# Altium PCB PS004.PcbDoc
Units mm, origin at the board's own origin, x right, y up, seen from the top; angles counter-clockwise.
Board outline 41 x 36.3 mm, 2 copper layers (Top Layer, Bottom Layer); 124 components, 75 nets, 275 pads, 82 vias.
Unrouted connection lines stored in the file: 1.
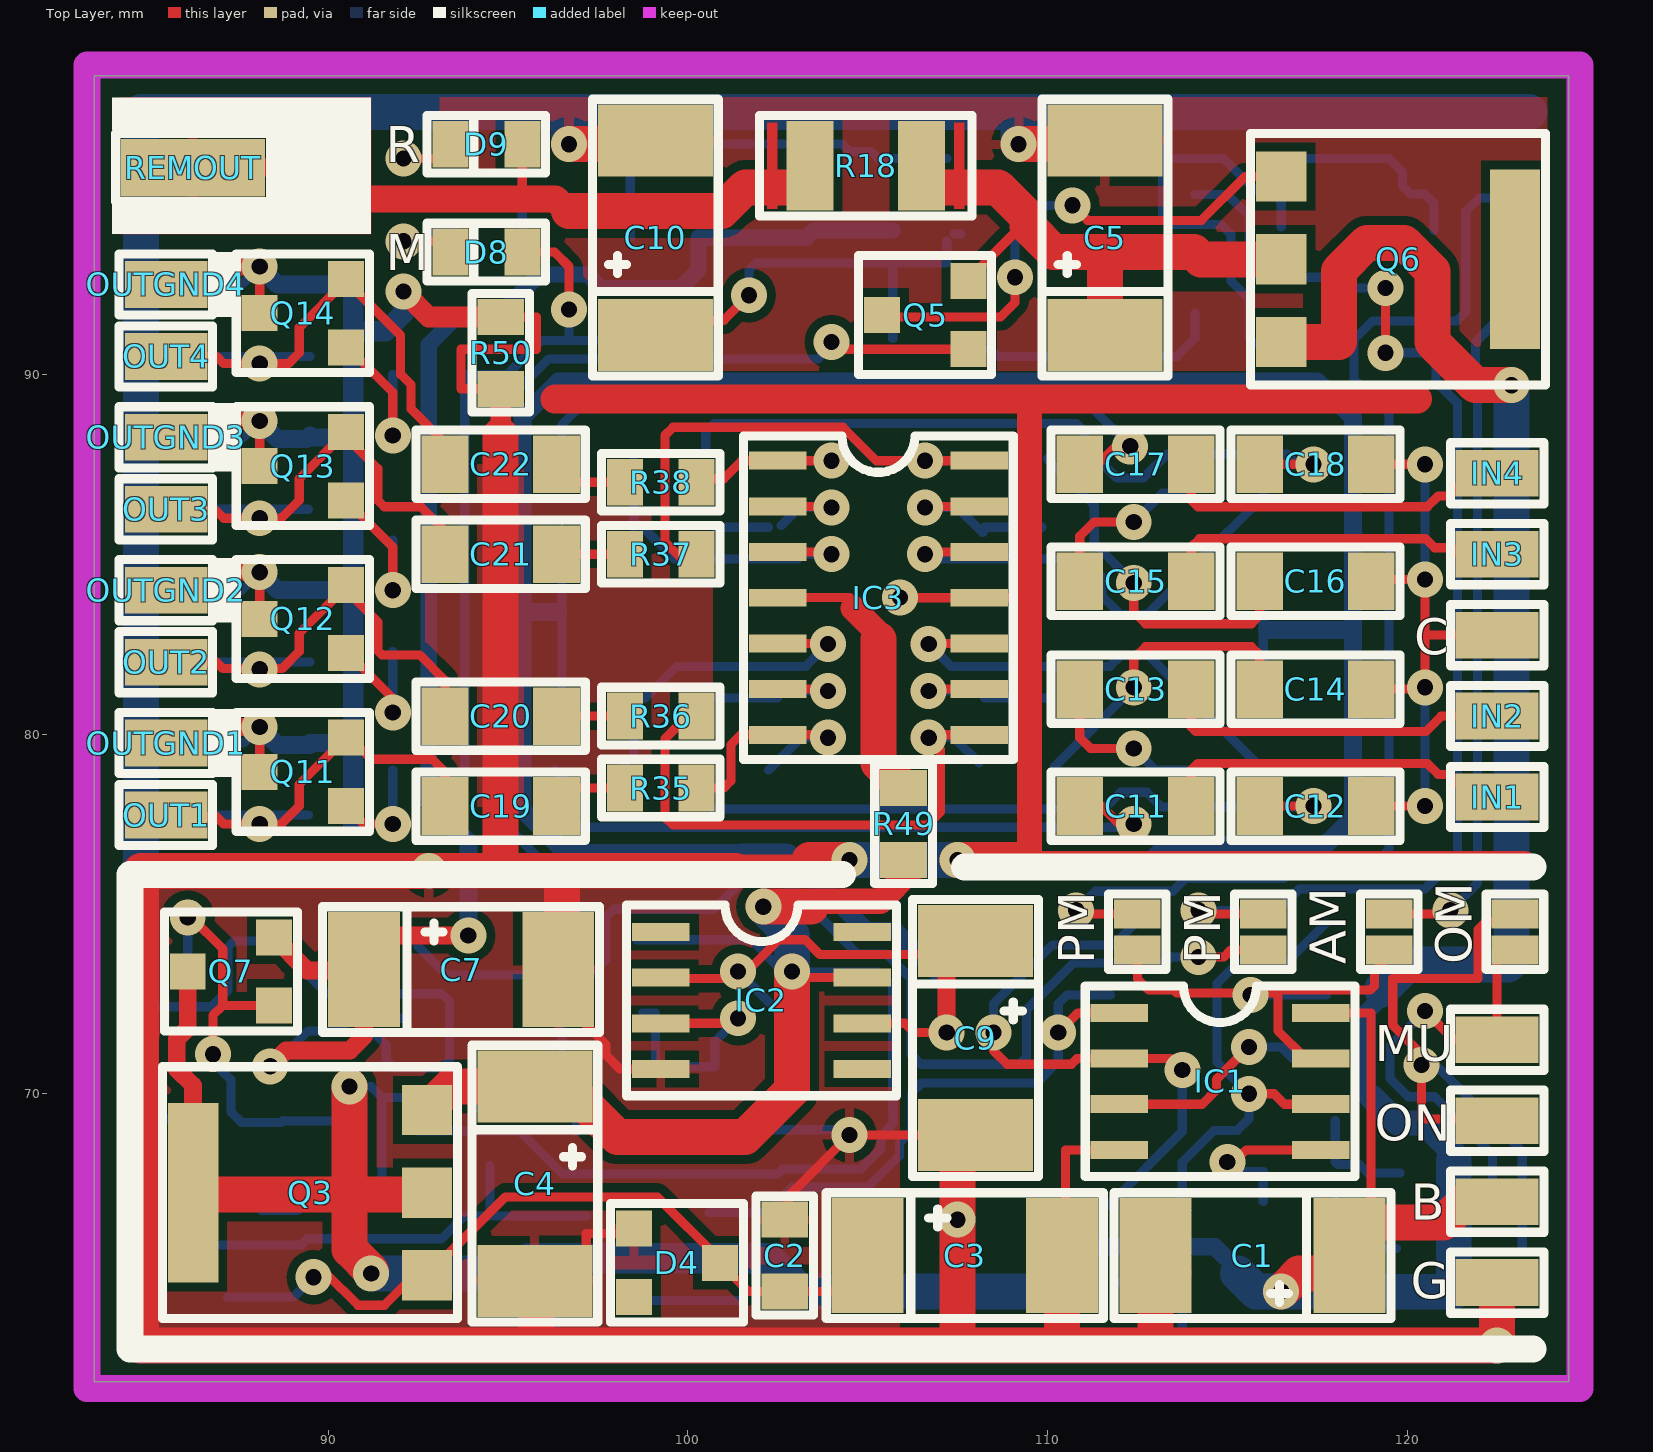
[diagram p0: Top Layer view]
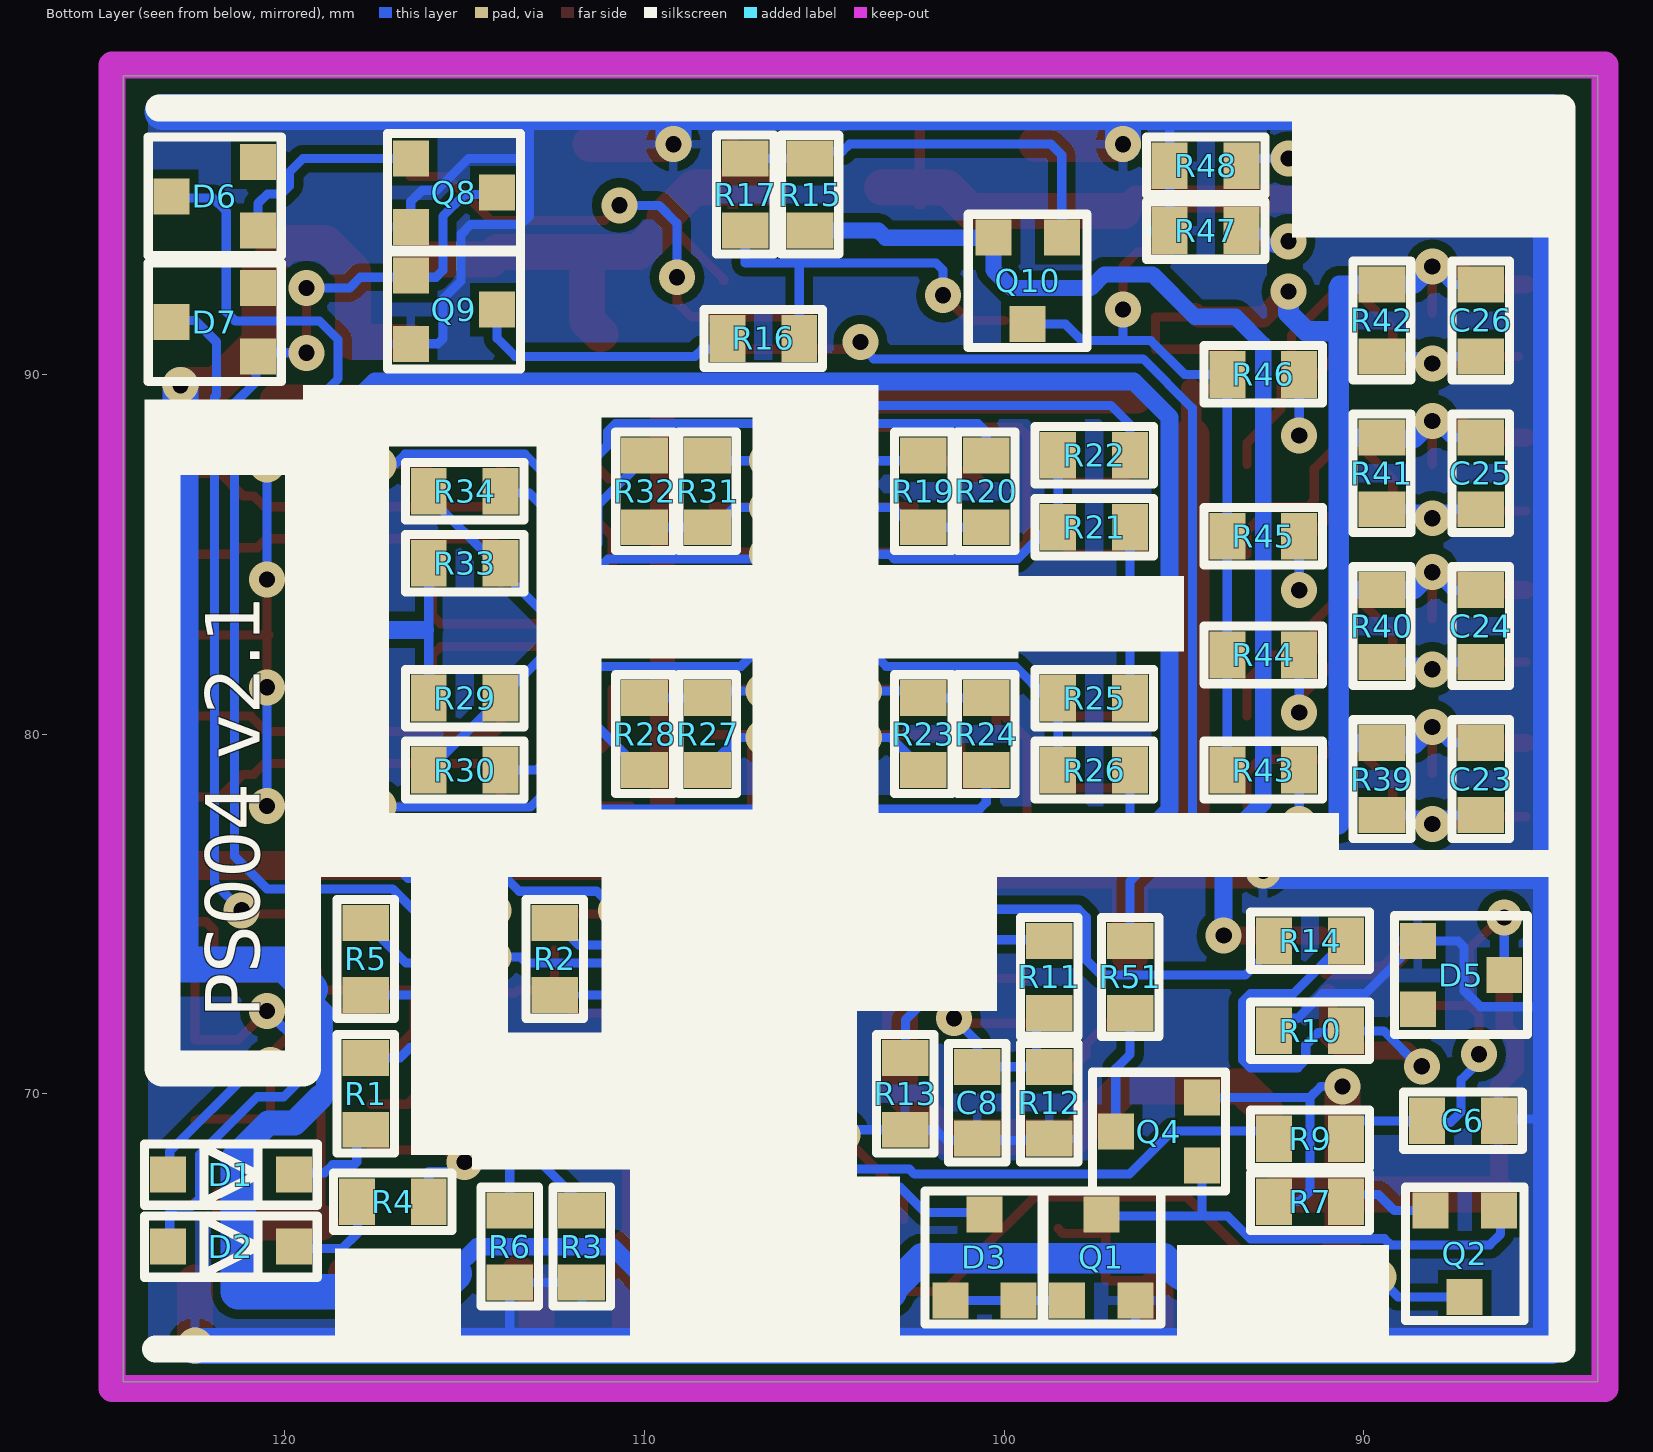
[diagram p1: Bottom Layer view, seen from below]

## Layer stack, top to bottom
Top Layer: signal copper 0.0356
Dielectric: dielectric 0.32, FR-4, Dk 4.8
Bottom Layer: signal copper 0.0356

## Board outline
83.5,98.3 83.5,62 124.5,62 124.5,98.3

## Design rules (kind name [scope] priority, off if disabled: settings)
Clearance [All] p1: gap=0.254
ComponentClearance [All] p1 off: gap=0.254 collisioncheckmode=3 verticalgap=0.254 showdistances=FALSE
PolygonConnect [All] p1: connectstyle=Relief reliefconductorwidth=0.254 reliefentries=4 polygonreliefangle="90 Angle"
RoutingCorners [All] p1: cornerstyle=Round minsetback=2.54 maxsetback=2.54
RoutingVias [All] p1: holewidth=0.45 width=1 viastyle="Through Hole" minholewidth=0.25 minwidth=0.45 maxholewidth=0.411 maxwidth=1.27
SilkToSilkClearance [All] p1 off: silktosilkclearance=0.254
SilkscreenOverComponentPads [All] p1 off: minsilkscreentomaskgap=0.254
SolderMaskExpansion [All] p1: expansion=0.102
Width [All] p1: maxlimit=1.5 minlimit=0.254 preferedwidth=0.254 minimp=50.000000 maximp=50.000000 favimp=50.000000
24 further rules are at their usual default settings.

## Components (designator, comment, footprint, x,y, rotation, side; value= is the part's Value field where it differs from the comment)
AM "SC plan" SC 119.5,74 r90 top
B "IN plan" IO 122.5,67 r0 top (schematic designator BU)
C "IN plan" IO 122.5,82.75 r0 top (schematic designator "IN COM")
C1 "C plan pol" C 118.4,65.5 r180 top
C2 "C plan cer" 0805 102.7,66.5 r270 top
C3 "C plan pol" C 105,65.5 r0 top
C4 "C plan pol" C 95.75,70.2 r270 top
C5 "C plan pol" C 111.6,91.1 r90 top
C6 "C plan cer" 0805 86.25,69.25 r0 bottom
C7 "C plan pol" C 91,73.45 r0 top
C8 "C plan cer" 0805 100.75,68.75 r90 bottom
C9 "C plan pol" C 108,74.25 r270 top
C10 "C plan pol" C 99.1,91.1 r90 top
C11 "C plan cer" 1206 114,78 r180 top
C12 "C plan cer" 1206 119,78 r180 top
C13 "C plan cer" 1206 114,81.25 r180 top
C14 "C plan cer" 1206 119,81.25 r180 top
C15 "C plan cer" 1206 114,84.25 r180 top
C16 "C plan cer" 1206 119,84.25 r180 top
C17 "C plan cer" 1206 114,87.5 r180 top
C18 "C plan cer" 1206 119,87.5 r180 top
C19 "C plan cer" 1206 93.25,78 r0 top
C20 "C plan cer" 1206 93.25,80.5 r0 top
C21 "C plan cer" 1206 93.25,85 r0 top
C22 "C plan cer" 1206 93.25,87.5 r0 top
C23 "C plan cer" 0805 86.75,79.75 r270 bottom
C24 "C plan cer" 0805 86.75,84 r270 bottom
C25 "C plan cer" 0805 86.75,88.25 r270 bottom
C26 "C plan cer" 0805 86.75,92.5 r270 bottom
D1 "D plan" SOD-123 119.75,67.75 r0 bottom
D2 "D plan" SOD-123 119.75,65.75 r0 bottom
D3 "DZ plan" SOT-23 101.5,64.25 r90 bottom
D4 "DZ plan" SOT-23 98.5,66.25 r0 top
D5 "DZ plan" SOT-23 88.5,74.25 r180 bottom
D6 "DZ plan" SOT-23 120.75,94 r0 bottom
D7 "DZ plan" SOT-23 120.75,90.5 r0 bottom
D8 "M" "0805 DI" 93.4,93.4 r0 top
D9 "R" "0805 DI" 93.4,96.4 r0 top
G "IN plan" IO 122.5,64.75 r0 top (schematic designator GND)
IC1 "IC 8 plan" SO-8 112,72.25 r0 top
IC2 "IC 8 plan" SO-8 99.25,74.5 r0 top
IC3 "IC 14 plan" SO-14 102.5,87.6 r0 top
IN1 "IN plan" IO 122.5,78.25 r0 top
IN2 "IN plan" IO 122.5,80.5 r0 top
IN3 "IN plan" IO 122.5,85 r0 top
IN4 "IN plan" IO 122.5,87.25 r0 top
MU "IN plan" IO 122.5,71.5 r0 top (schematic designator MUTE)
OM "SC plan" SC 123,74 r90 top
ON "IN plan" IO 122.5,69.25 r0 top
OUT1 "OUT plan" IO 85.5,77.75 r180 top
OUT2 "OUT plan" IO 85.5,82 r180 top
OUT3 "OUT plan" IO 85.5,86.25 r180 top
OUT4 "OUT plan" IO 85.5,90.5 r180 top
OUTGND1 "OUT plan" IO 85.5,79.75 r180 top
OUTGND2 "OUT plan" IO 85.5,84 r180 top
OUTGND3 "OUT plan" IO 85.5,88.25 r180 top
OUTGND4 "OUT plan" IO 85.5,92.5 r180 top
PM "SC plan" SC 116,75 r270 top (schematic designator PM1)
PM "SC plan" SC 112.5,74 r90 top (schematic designator PM0)
Q1 "QD npn plan" SOT-23 98.25,64.25 r90 bottom
Q2 "QD pnp plan" SOT-23 86.25,66.75 r270 bottom
Q3 "Q npn plan" SOT-223 92.75,64.95 r180 top
Q4 "QD pnp plan" SOT-23 94.5,68 r0 bottom
Q5 "Q npn plan" SOT-23 107.8,90.7 r180 top
Q6 "Q pnp plan" SOT-223 116.5,95.5 r0 top
Q7 "Q npn plan" SOT-23 88.5,72.45 r180 top
Q8 "QD npn plan" SOT-23 116.5,96 r180 bottom
Q9 "QD npn plan" SOT-23 116.5,92.75 r180 bottom
Q10 "Q pnp plan" SOT-23 98.4,93.8 r270 bottom
Q11 "Q npn plan" SOT-23 90.5,78 r180 top
Q12 "Q npn plan" SOT-23 90.5,82.25 r180 top
Q13 "Q npn plan" SOT-23 90.5,86.5 r180 top
Q14 "Q npn plan" SOT-23 90.5,90.75 r180 top
R1 "R plan" 0805 117.75,69 r90 bottom
R2 "R plan" 0805 112.5,74.75 r270 bottom
R3 "R plan" 0805 111.75,64.75 r90 bottom
R4 "R plan" 0805 118,67 r180 bottom
R5 "R plan" 0805 117.75,72.75 r90 bottom
R6 "R plan" 0805 113.75,64.75 r90 bottom
R7 "R plan" 0805 92.5,67 r180 bottom
R9 "R plan" 0805 92.5,68.75 r180 bottom
R10 "R plan" 0805 92.5,71.75 r180 bottom
R11 "R plan" 0805 98.75,72.25 r90 bottom
R12 "R plan" 0805 98.75,68.75 r90 bottom
R13 "R plan" 0805 102.75,69 r90 bottom
R14 "R plan" 0805 92.5,74.25 r180 bottom
R15 "R plan" 0805 105.4,96 r270 bottom
R16 "R plan" 0805 105.7,91 r0 bottom
R17 "R plan" 0805 107.2,94 r90 bottom
R18 "R plan" 1210 106.5,95.8 r180 top
R19 "R plan" 0805 102.25,85.75 r90 bottom
R20 "R plan" 0805 100.5,85.75 r90 bottom
R21 "R plan" 0805 98.5,85.75 r180 bottom
R22 "R plan" 0805 98.5,87.75 r180 bottom
R23 "R plan" 0805 102.25,79 r90 bottom
R24 "R plan" 0805 100.5,81 r270 bottom
R25 "R plan" 0805 98.5,81 r180 bottom
R26 "R plan" 0805 98.5,79 r180 bottom
R27 "R plan" 0805 108.25,79 r90 bottom
R28 "R plan" 0805 110,79 r90 bottom
R29 "R plan" 0805 116,81 r180 bottom
R30 "R plan" 0805 114,79 r0 bottom
R31 "R plan" 0805 108.25,85.75 r90 bottom
R32 "R plan" 0805 110,87.75 r270 bottom
R33 "R plan" 0805 116,84.75 r180 bottom
R34 "R plan" 0805 114,86.75 r0 bottom
R35 "R plan" 0805 98.25,78.5 r0 top
R36 "R plan" 0805 98.25,80.5 r0 top
R37 "R plan" 0805 98.25,85 r0 top
R38 "R plan" 0805 98.25,87 r0 top
R39 "R plan" 0805 89.5,79.75 r270 bottom
R40 "R plan" 0805 89.5,84 r270 bottom
R41 "R plan" 0805 89.5,88.25 r270 bottom
R42 "R plan" 0805 89.5,92.5 r270 bottom
R43 "R plan" 0805 91.8,79 r0 bottom
R44 "R plan" 0805 91.8,82.2 r0 bottom
R45 "R plan" 0805 91.8,85.5 r0 bottom
R46 "R plan" 0805 91.8,90 r0 bottom
R47 "R plan" 0805 95.4,94 r180 bottom
R48 "R plan" 0805 95.4,95.8 r180 bottom
R49 "R plan" 0805 106,76.5 r90 top
R50 "R plan" 0805 94.8,91.6 r270 top
R51 "R plan" 0805 96.5,72.25 r90 bottom
REMOUT "OUT plan" IOEX 86.25,95.75 r180 top

## Footprints (in the part's own frame and the unit in brackets; to place one, negate y for a bottom-side part, rotate by r counter-clockwise, add the part's x,y. Pads: shape width x height; smd on the part's side, far side on the other; paste and mask are expansions set on the pad)
0805 [mm]
  rect 1x1.3 smd: 1(0,0) 2(2,0)
  silkscreen extent -0.65,-0.8 2.65,0.8
"0805 DI" [mm]
  rect 1x1.3 smd: 1(0,0) 2(2,0)
  silkscreen extent -0.65,-0.8 2.65,0.8
1206 [mm]
  rect 1.3x1.6 smd: 1(0,0) 2(3.1,0)
  silkscreen extent -0.8,-0.95 3.9,0.95
1210 [mm]
  rect 1.3x2.5 smd: 1(0,0) 2(3.1,0)
C [mm]
  rect 2x3.2 smd: 1(0,0) 2(5.4,0)
  silkscreen extent -1.15,-1.75 6.55,1.75
IO [mm]
  rect 2.3x1.3 smd: 1(0,0)
  silkscreen extent -1.29,-0.85 1.31,0.85
IOEX [mm]
  rect 4x1.6 smd: 1(0,0)
  silkscreen extent -2.15,-0.95 2.15,0.95
SC [mm]
  rect 0.8x1.3 smd: 1(0,0) 2(1,0)
  silkscreen extent -0.55,-0.8 1.55,0.8
SO-8 [mm]
  rect 1.6x0.5 smd: 1(0,0) 2(0,-1.27) 3(0,-2.54) 4(0,-3.81) 5(5.6,-3.81) 6(5.6,-2.54) 7(5.6,-1.27) 8(5.6,0)
  silkscreen extent -0.95,-4.55 6.55,0.74
SO-14 [mm]
  rect 1.6x0.5 smd: 1(0,0) 2(0,-1.27) 3(0,-2.54) 4(0,-3.81) 5(0,-5.08) 6(0,-6.35) 7(0,-7.62) 8(5.6,-7.62) 9(5.6,-6.35) 10(5.6,-5.08) 11(5.6,-3.81) 12(5.6,-2.54) 13(5.6,-1.27) 14(5.6,0)
  silkscreen extent -0.95,-8.31 6.55,0.69
SOD-123 [mm]
  rect 1x1 smd: 1(0,0) 2(3.5,0)
  silkscreen extent -0.65,-0.85 4.15,0.85
SOT-23 [mm]
  rect 1x1 smd: 1(0,0) 2(2.4,-0.95) 3(0,-1.9)
  silkscreen extent -0.65,-2.6 3.05,0.7
SOT-223 [mm]
  rect 1.4x1.4 smd: 1(0,0) 2(0,-2.3) 3(0,-4.6)
  rect 1.4x5 smd: 4(6.5,-2.3)
  silkscreen extent -0.85,-5.8 7.35,1.2

## Part data
D8 D9: library part "DI plan"

## Via types
v1: diameter 1, hole 0.45, Top Layer to Bottom Layer, tented both sides, 82 vias

## Nets (pads, with @x,y where several pads share a name; then routed paths per layer and width w, separated by ;. In a path a pad name is that pad's centre, name@x,y a point inside that pad or via, vN(x,y) a via of type N, cw(c..) or ccw(c..) an arc to the next point about the centre after c; other vN are vias at no path point)
BU: B.1 C1.1 IC1.8 Q3.2 Q3.4 Q4.3 Q6.3 Q7.2 R7.1 | length 112.2
  Top Layer w0.254: Q7.2@85.809,73.109 Q7.2 ; Q3.2@92.6,67.25 Q3.2 ; IC1.8 118.999,72.25 ; C1.1@119,66.421 119,72.249 ; B.1@121.59,67 B.1
  Top Layer w0.48: 85.797,70.683 86.25,70.23 ; 85.797,70.703 85.797,71.517 86.1,71.82
  Top Layer w0.5: 86.1,71.82 Q7.2 ; Q3.4 86.25,70.23
  Top Layer w1: Q3.4@86.25,67.2 90.6,67.2 ; v1(90.6,70.2) 90.6,67.2 ; v1@91.2,65.073 90.6,65.673 90.6,67.2 ; Q3.2@92.5,67.2 90.6,67.2 ; v1(116.5,64.5) 116.9,64.9 ; Q6.3 118.1,90.9 118.1,92.873 118.881,93.654 119.919,93.654 120.7,92.873 120.7,90.9 121.9,89.7 v1(122.9,89.7) ; 117,65 C1.1@118.3,65 ; C1.1@117.9,64.8 C1.1@118.3,64.8 ; C1.1@119,66.421 121.011,66.421 B.1@121.59,67
  Bottom Layer w0.254: v1(90.6,70.2) 91.2,70.2 91.5,69.9 ; R7.1 91.8,67 91.5,67.3 91.5,69.9 ; Q4.3@94.2,69.6 Q4.3 91.5,69.9
  Bottom Layer w0.48: 109.651,64.5 110.895,65.744 114.656,65.744 115.3,65.1 ; 118.898,70.022 118.898,72.298 119.3,72.7
  Bottom Layer w0.7: 119.01,69.91 119.732,69.188 120.462,69.188 121.296,68.354
  Bottom Layer w0.85: 95.14,65 95.569,65.429 102.281,65.429 103.21,64.5
  Bottom Layer w1: v1(91.2,65) 95,65 ; 103.21,64.5 109.651,64.5 ; 115.3,65 115.8,64.5 v1(116.5,64.5) ; v1@116.5,64.496 121.296,64.496 121.296,68.142 ; 119.3,72.9 120,73.6 122.8,73.6 ; 122.9,73.7 v1(122.9,89.7)
GND: C1.2 C2.1 C3.2 C4.2 C5.2 C6.1 C7.2 C8.1 C9.2 C10.2 D4.1 D5.1 G.1 IC1.4 IC2.4 IC3.11 Q1.3 Q8.3 Q9.3 R3.1 R6.1 R10.1 R12.1 R13.1 R47.1 R48.1 R50.2 | length 344.4
  Top Layer w0.254: R50.2 93.7,89.6 93.7,90.7 95.8,90.7 ; C4.2 97.18,64.8 97.18,66.116 98.366,66.116 D4.1 ; C7.2@96.6,72.489 97.731,71.358 97.731,71.069 98.11,70.69 IC2.4 ; C7.2@96.89,72.5 C7.2@96.949,72.441 ; C2.1@102.8,66.5 102.8,67.154 v1(104.496,68.85) C9.2@107.5,68.85 ; v1@105.91,83.79 IC3.11 ; IC3.11@108.2,83.8 109.4,83.8 ; C3.2@110.4,65.8 110.5,65.9 110.5,68.44 IC1.4
  Top Layer w0.58: 94.8,88.3 R50.2
  Top Layer w0.7: 101.404,76.304 102.557,76.304 103.188,76.304 ; 109.5,76.7 109.5,78.5 ; 109.504,78.504 109.504,89.3
  Top Layer w0.8: 96.312,89.312 120.288,89.312 ; 109.3,76.5 109.454,76.346 123.246,76.346
  Top Layer w1: v1@92.596,76.196 84.796,76.196 84.796,63.004 84.8,63 95.8,63 ; v1@92.6,76.2 v1(92.8,76.2) 94.8,76.2 ; 94.8,88.3 94.8,76.2 ; C4.2@95.8,64.6 95.8,63 ; C7.2@96.5,73.8 96.5,76.2 ; v1(96.7,96.4) C10.2@99.1,96.4 ; 101.327,76.2 96.5,76.2 ; 103.384,76.5 v1@104.3,76.5 ; C9.2@107.5,68.9 107.5,68.85 107.5,63 ; v1(107.5,76.5) 109.3,76.5 ; v1(109.2,96.4) C5.2@111.5,96.4 ; C3.2@110.4,65.8 110.4,63 107.5,63 ; 110.5,63 113,63 ; C1.2@113.5,65 113,64.5 113,63 ; G.1 v1(122.5,63) 113,63 ; 94.8,76.2 96.5,76.2 ; 95.8,63 107.5,63
  Bottom Layer w0.254: 84.9,69.3 C6.1@86.25,69.3 ; 84.919,72.419 86.758,72.419 87.224,72.885 87.224,74.085 87.389,74.25 D5.1 89.969,72.781 91.158,72.781 91.839,72.1 R10.1@92.013,72.1 ; R47.1 95.4,97.3 ; 96.35,63.05 Q1.3 ; R12.1@98.7,68.7 101.6,68.7 101.9,69 104.346,69 v1(104.496,68.85) ; R3.1@112,64.75 112.7,64.75 R6.1 113.75,63.05 ; 113.2,97.3 113.2,96 ; Q9.3 115.75,90.85 115.6,91 115.6,92.1 115.1,92.6 115.1,93.9 114.831,94.169 113.442,94.169 113.2,94.411 113.2,96 ; Q8.3 116.5,94.8 116.181,95.119 115.781,95.119 114.9,96 113.2,96
  Bottom Layer w1: v1(92.8,76.2) 84.8,76.2 ; v1(96.7,96.4) 96.7,97.2 ; v1(104.5,76.5) v1(107.5,76.5) ; v1(109.2,96.4) 109.2,97.2 ; v1@122.5,62.992 84.8,62.992 84.8,76.2 ; 123.4,97.3 113.2,97.3 95.4,97.3 84.8,97.3 84.8,76.2
  other v1: 107.5,66.5 105.9,83.8
GNDOUT: C23.1 C24.1 C25.1 C26.1 OUTGND1.1 OUTGND2.1 OUTGND3.1 OUTGND4.1 Q11.2 Q12.2 Q13.2 Q14.2 R39.1 R40.1 R41.1 R42.1 R50.1 | length 55.7
  Top Layer w0.254: Q11.2@88.1,78.9 v1(88.1,80.2) ; Q12.2 v1(88.1,84.5) ; Q13.2@88.1,87.5 v1(88.1,88.7) ; Q14.2 v1(88.1,93) ; R50.1 95.8,91.6 95.8,90.7
  Top Layer w0.5: OUTGND1.1 86.95,79.75 87.4,80.2 v1(88.1,80.2) ; OUTGND2.1 86.9,84 87.4,84.5 v1(88.1,84.5) ; OUTGND3.1 86.95,88.25 87.4,88.7 v1(88.1,88.7) ; OUTGND4.1 86.9,92.5 87.4,93 v1(88.1,93)
  Top Layer w0.58: v1(92.1,92.3) 92.8,91.6 94.6,91.6 R50.1@94.7,91.7
  Bottom Layer w0.254: C23.1 87.65,79.75 v1(88.1,80.2) ; C24.1 87.6,84 v1(88.1,84.5) ; C25.1 87.65,88.25 v1(88.1,88.7) ; C26.1 87.6,92.5 v1(88.1,93)
  Bottom Layer w0.5: v1(88.1,80.2) 88.6,79.7 R39.1@89.5,79.7 ; v1(88.1,84.5) 88.6,84 R40.1 90.7,84 ; v1(88.1,88.7) 88.6,88.2 89.4,88.2 R41.1@89.5,88.3 ; v1(88.1,93) 88.6,92.5 R42.1 90.7,92.5 ; R39.1 90.7,79.75 90.746,79.75 ; R41.1 90.65,88.25
  Bottom Layer w0.58: 90.7,77.5 90.7,79.75 90.7,91.2 ; 90.7,92.4 90.7,91.2 ; v1(92.1,92.3) 92.1,91.7 91.6,91.2 90.7,91.2
MUT: D8.2 Q10.2 R43.2 R44.2 R45.2 R46.2 | length 20.6
  Top Layer w0.254: D8.2 96.3,93.4 96.7,93 v1(96.7,91.8)
  Bottom Layer w0.254: R43.2 R44.2 R46.2 94.989,90 95.928,90.939 97.839,90.939 98.3,91.4 Q10.2@99.4,91.4 ; 96.7,91 v1(96.7,91.8)
NetAM_1: AM.1 IC1.7 PM.1@112.5,74 R5.1 | length 12.6
  Top Layer w0.254: PM.1@112.5,74 112.5,73.2 112.819,72.881 113.519,72.881 113.6,72.8 115.434,72.8 115.515,72.881 v1(115.646,72.75) ; v1@115.796,72.8 116.4,72.8 ; IC1.7@117.183,70.98 116.408,71.755 116.408,72.8 116.489,72.881 118.973,72.881 119.092,73 119.092,73.41 AM.1@119.39,73.708
  Bottom Layer w0.254: v1(115.646,72.75) R5.1
NetAM_2: AM.2 D7.2 | length 19.4
  Top Layer w0.254: AM.2 121.1,75 v1(121.2,75.1)
  Bottom Layer w0.254: v1(121.2,75.1) 121.961,75.861 121.961,76.5 ; 121.961,76.442 121.961,76.5 ; D7.2@123.15,91.5 122.5,91.5 121.9,90.9 121.9,89.418 121.961,89.358 121.961,76.5
NetC2_2: C2.2 C3.1 D4.2 Q2.2 Q3.1 | length 21
  Top Layer w0.254: v1(89.6,64.9) 89.7,65 89.954,65 90.835,64.119 91.565,64.119 92.446,65 Q3.1@92.6,65 ; Q3.1@92.9,65.1 94.931,67.131 99.158,67.131 100.9,65.389 D4.2 101.7,64.5 103.25,64.5 C3.1@105.5,64.5
  Bottom Layer w0.254: Q2.2 89.05,64.35 v1(89.6,64.9)
NetC5_1: C5.1 Q5.3 Q6.2 R18.1 | length 15.4
  Top Layer w0.254: Q5.3 107.8,92.646 109.154,94
  Top Layer w1: R18.1@106.5,95.2 108.627,95.2 109.446,94.381 109.446,94.127 110.173,93.4 111.6,93.4 ; C5.1@111.219,91.119 111.6,91.5 111.6,93.4 ; Q6.2 114.273,93.2 114.073,93.4 111.6,93.4
NetC6_2: C6.2 D5.2 Q7.1 R9.2 | length 12.4
  Top Layer w0.254: v1@86.2,74.9 87.071,74.029 87.071,72.45 ; v1(86.8,71.1) 86.8,72.179 87.071,72.45 ; Q7.1 87.071,72.45
  Bottom Layer w0.254: D5.2 v1(86.1,74.9) ; v1(86.8,71.1) 86.8,70.889 87.3,70.389 87.3,69.5 87.6,69.2 C6.2@88.7,69.2 ; C6.2@88.75,69.25 88.75,69.24 90.5,69.24 R9.2@90.5,69.25
NetC8_2: C8.2 IC2.3 R11.1 R12.2 | length 7.5
  Top Layer w0.254: IC2.3 v1@101.26,71.96
  Bottom Layer w0.254: R12.2 R12.2@99.108,70.75 ; R11.1 99.108,72.25 R12.2@99.108,70.75 ; v1(101.4,72.1) 100.75,71.45 C8.2 100.609,70.75 R12.2@99.108,70.75
NetC10_1: C10.1 R16.1 R17.1 | length 11.2
  Top Layer w0.254: C10.1@100,91.5 101,91.5 v1(101.7,92.2)
  Bottom Layer w0.254: v1(101.7,92.2) 101.7,92.9 101.9,93.1 105.7,93.1 ; R16.1 105.7,93.1 ; R17.1@107.2,93.7 107.2,93.1 105.7,93.1 ; R17.1@107.4,93.9 R17.1@107.6,93.9
NetC11_1: C11.1 IN1.1 | length 9.8
  Top Layer w0.254: C11.1@114,78.2 114,79 114.181,79.181 120.565,79.181 120.865,78.881 121.165,78.881 121.796,78.25 IN1.1
NetC11_2: C11.2 R26.2 | length 21
  Top Layer w0.254: C11.2@110.4,78 111.5,78 112,77.5 112.1,77.6 112.7,77.6 112.5,77.6 v1(112.4,77.5)
  Bottom Layer w0.254: R26.2@96.3,79 96.5,78.8 96.5,77.7 96.789,77.411 111.911,77.411 112.1,77.6 112.7,77.6 112.5,77.6 v1(112.4,77.5)
NetC12_1: C12.1 C14.1 C16.1 C18.1 C.1 | length 20.2
  Top Layer w0.254: C12.1 120.8,78 v1(120.5,78) ; C14.1 v1@120.35,81.25 ; C16.1@119,84.3 v1(120.5,84.3) v1(120.5,81.3) ; C18.1 v1@120.3,87.5 ; 120.45,82.75 C.1 ; v1(120.5,81.3) 120.8,81.3 v1(120.5,81.3)
  Bottom Layer w0.254: v1(120.5,84.3) v1(120.5,87.5) ; v1(120.5,78) v1(120.5,81.3) ; v1(120.5,78) 120.8,78 v1(120.5,78) ; v1(120.5,81.3) 120.8,81.3 v1(120.5,81.3) ; v1(120.5,87.5) 120.8,87.5 v1(120.5,87.5)
NetC12_2: C12.2 R24.2 | length 19.3
  Top Layer w0.254: C12.2@116.1,78 v1(117.4,78)
  Bottom Layer w0.254: R24.2@100.5,78.8 100.5,78.1 100.681,77.919 111.573,77.919 112.035,78.381 112.765,78.381 113.177,77.969 117.369,77.969 v1(117.4,78)
NetC13_1: C13.1 IN2.1 | length 9.8
  Top Layer w0.254: C13.1@114,81.3 C13.1 114,80.2 114.131,80.069 120.515,80.069 120.946,80.5 IN2.1
NetC13_2: C13.2 R30.1 | length 4.9
  Top Layer w0.254: C13.2 110.9,79.9 111.2,79.6 112.3,79.6 v1@112.4,79.7
  Bottom Layer w0.254: v1(112.4,79.6) 113,79 R30.1
NetC14_2: C14.2 R28.1 | length 8.6
  Top Layer w0.254: v1(112.4,81.3) 112.4,82.1 112.731,82.431 115.669,82.431 115.9,82.2 C14.2
  Bottom Layer w0.254: R28.1@110.2,79.1 v1(112.4,81.3)
NetC15_1: C15.1 IN3.1 | length 9.8
  Top Layer w0.254: C15.1@114,84.2 C15.1 114,85.2 114.231,85.431 120.515,85.431 120.765,85.181 121.265,85.181 121.446,85 IN3.1
NetC15_2: C15.2 R34.1 | length 4.7
  Top Layer w0.254: C15.2 110.9,85.5 111.3,85.9 v1(112.4,85.9)
  Bottom Layer w0.254: v1(112.4,85.9) 113.2,86.7 R34.1@113.9,86.7
NetC16_2: C16.2 R32.1 | length 9.9
  Top Layer w0.254: v1(112.4,84.2) 112.4,83.4 112.731,83.069 115.669,83.069 115.9,83.3 C16.2
  Bottom Layer w0.254: R32.1@110,87.662 111.3,86.362 111.3,85.3 v1(112.4,84.2)
NetC17_1: C17.1 IN4.1 | length 10
  Top Layer w0.254: C17.1 114,86.5 114.181,86.319 120.565,86.319 120.865,86.619 121.165,86.619 121.796,87.25 IN4.1
NetC17_2: C17.2 R22.2 | length 19.1
  Top Layer w0.254: C17.2@111,87.1 111.9,88 v1(112.3,88)
  Bottom Layer w0.254: R22.2@96.6,87.7 96.5,87.8 96.5,88.6 97.039,89.139 111.161,89.139 v1(112.3,88)
NetC18_2: C18.2 R20.2 | length 20
  Top Layer w0.254: C18.2@116,87.5 v1(117.4,87.5)
  Bottom Layer w0.254: R20.2@100.5,88 100.5,88.4 100.731,88.631 109.192,88.631 110.808,88.631 111.031,88.408 111.031,88.023 111.935,87.119 112.665,87.119 113.327,87.781 116.658,87.781 116.939,87.5 v1(117.4,87.5)
NetC19_2: C19.2 R35.1 | length 1.9
  Top Layer w0.254: C19.2@96.4,78.5 R35.1
NetC20_2: C20.2 R36.1 | length 1.8
  Top Layer w0.254: C20.2@96.5,80.5 R36.1
NetC21_2: C21.2 R37.1 | length 2.2
  Top Layer w0.254: C21.2@96,85 R37.1
NetC22_2: C22.2 R38.1 | length 1.6
  Top Layer w0.254: C22.2@96.6,87 R38.1
NetD1_1: D1.1 R1.1 | length 3.1
  Bottom Layer w0.254: R1.1@118,69.25 118,68.1 118.069,68.031 118.669,68.031 118.9,67.8 D1.1@119.8,67.8
NetD1_2: D1.2 OM.2 ON.1 | length 15.4
  Top Layer w0.254: OM.2@122.481,74.781 122.192,74.781 121.969,74.558 121.969,73.2 119.6,73.2 119.6,71.9 120.4,71.1 120.4,69.3 122.4,69.3 ON.1
  Bottom Layer w0.254: v1(120.4,70.8) 120.4,70.6 120.5,70.7 120.9,70.7 123.2,68.4 D1.2@123.2,67.7
NetD2_1: D2.1 R4.1 | length 2.8
  Bottom Layer w0.254: R4.1 117.983,66.988 117.983,66.117 118.4,65.7 D2.1@119.703,65.7
NetD2_2: D2.2 MU.1 OM.1 | length 14.6
  Top Layer w0.254: v1(120.5,72.3) 121.3,71.5 MU.1 122.5,74 OM.1
  Bottom Layer w0.254: v1@120.4,72.3 120.45,72.25 120.5,72.2 v1@120.5,72.146 ; v1(120.5,72.3) 119.519,71.319 119.519,70.435 120.035,69.919 120.765,69.919 122.369,68.315 122.369,67.092 122.592,66.869 123.031,66.869 123.2,66.7 D2.2@123.2,65.8
NetD3_1: D3.1 D3.3 Q1.1 | length 3.2
  Bottom Layer w0.254: Q1.1 D3.3 D3.1
NetD3_2: D3.2 IC1.1 R2.2 | length 17.3
  Top Layer w0.254: v1(110.3,71.7) 110.85,72.25 IC1.1
  Bottom Layer w0.254: D3.2@100.6,66.7 102.2,66.7 102.9,67.4 105.01,67.4 105.885,68.275 105.885,68.631 106.218,68.965 106.218,70.018 106.5,70.3 109.7,70.3 110.3,70.9 v1(110.3,71.7) 110.3,72.5 110.55,72.75 111.75,72.75
NetD6_1: D6.1 Q8.1 | length 5.7
  Bottom Layer w0.254: Q8.1 119.5,96 119.869,95.631 119.869,95.242 120.092,95.019 120.481,95.019 120.75,94.75 D6.1
NetD6_2: D6.2 PM.2@112.5,75 | length 33.5
  Top Layer w0.254: v1(110.8,75.1) 110.9,75 PM.2@112.5,75
  Bottom Layer w0.254: v1(110.8,75.1) 111.331,75.631 113.485,75.631 113.835,75.981 116.574,75.981 116.793,76.2 118.9,76.2 119.5,76.8 119.5,88.9 118.519,89.881 118.519,90.965 119.035,91.481 121.381,91.481 ; 121.408,91.519 121.631,91.742 121.631,94.531 122,94.9 D6.2@123.1,94.9
NetD7_1: D7.1 PM.1@116,75 Q8.2 Q9.1 | length 34
  Top Layer w0.254: v1(114.2,75.1) 114.3,75 PM.1@116,75 ; v1(119.4,90.6) v1(119.4,92.4)
  Bottom Layer w0.254: Q8.2@114.1,95 115,95 115.608,94.392 115.608,92.892 115.8,92.7 117.9,92.7 118.2,92.4 v1(119.4,92.4) ; v1(114.2,75.1) 116.411,75.1 117.003,75.692 120.492,75.692 121.4,76.6 121.4,89.2 120.8,89.8 D7.1@120.8,90.4 ; v1(119.4,90.6) D7.1@120.6,90.6 ; D7.1@120.7,90.5 D7.1
NetD8_1: D8.1 R47.2 | length 2.3
  Top Layer w0.254: v1@92.5,93.7 D8.1@93.4,93.7
  Bottom Layer w0.254: v1@92.5,93.7 92.5,93.5 93,94 R47.2@93.5,94
  other v1: 92.1,93.7
NetD9_1: D9.1 R48.2 | length 1.7
  Top Layer w0.254: v1@92.5,96 D9.1@93.4,96
  Bottom Layer w0.254: v1@92.5,96 R48.2@93.3,96
  other v1: 92.1,96
NetIC1_2: IC1.2 R2.1 R3.2 | length 16.1
  Top Layer w0.254: v1@108.5,71.5 108.5,71.2 108.881,70.819 110.665,70.819 110.826,70.98 IC1.2 113.433,70.98 v1(113.75,70.663)
  Bottom Layer w0.254: v1(108.5,71.7) 108.5,72.5 110.139,74.139 111.839,74.139 R2.1@112.4,74.7 ; R3.2@111.7,66.9 113.75,68.95 v1(113.75,70.663)
NetIC1_3: IC1.3 R1.2 | length 6.7
  Top Layer w0.254: IC1.3 114.3,69.71 114.7,70.11 114.7,70.4 v1(115.6,71.3)
  Bottom Layer w0.254: v1(115.6,71.3) 116.5,71.3 116.8,71 R1.2
NetIC1_5: IC1.5 R4.2 | length 4.8
  Top Layer w0.254: v1@114.935,67.843 115.532,68.44 IC1.5
  Bottom Layer w0.254: v1@114.935,67.843 116,67.843 R4.2
  other v1: 115,68.1
NetIC1_6: IC1.6 R5.2 R6.2 | length 13.8
  Top Layer w0.254: v1(115.6,70) 116.3,70 116.59,69.71 IC1.6
  Bottom Layer w0.254: R6.2@113.894,66.75 R6.2 113.75,68.096 114.635,68.981 115.281,68.981 115.6,69.3 v1(115.6,70) 114.719,70.881 114.719,73.069 115.281,73.631 116.631,73.631 R5.2
NetIC3_1: IC3.1 R19.2 R38.2 | length 5.2
  Top Layer w0.254: R38.2@100.5,86.9 100.7,87.1 101,87.1 101.5,87.6 IC3.1 v1@103.9,87.6
  Bottom Layer w0.254: R19.2@102.5,87.6 v1(104,87.6)
NetIC3_2: IC3.2 R19.1 R20.1 | length 4.6
  Top Layer w0.254: IC3.2 v1@103.97,86.33
  Bottom Layer w0.254: R20.1@100.75,85.75 R19.1 ; R19.1@102.6,85.8 103.1,86.3 v1(104,86.3)
NetIC3_3: IC3.3 R21.1 R22.1 | length 9
  Top Layer w0.254: IC3.3 v1@103.94,85.06
  Bottom Layer w0.254: R21.1 R22.1@98.5,87.6 ; R21.1@98.7,85.8 99.631,84.869 103.058,84.869 103.189,85 v1(104,85)
NetIC3_5: IC3.5 R25.1 R26.1 | length 9.5
  Top Layer w0.254: IC3.5 v1@103.98,82.52
  Bottom Layer w0.254: R26.1@98.2,79.1 98.5,79.4 R25.1 98.811,81 99.692,81.881 103.281,81.881 v1(103.9,82.5)
NetIC3_6: IC3.6 R23.2 R24.1 | length 5.2
  Top Layer w0.254: IC3.6 v1@103.95,81.25
  Bottom Layer w0.254: R24.1 R23.2 ; R23.2@102.5,81 R23.2 ; v1(103.9,81.2) 102.45,81.2 R23.2
NetIC3_7: IC3.7 R23.1 R35.2 | length 6.9
  Top Layer w0.254: R35.2@100.3,78.5 101,78.5 101.2,78.7 101.2,79.7 101.48,79.98 IC3.7 v1@104.02,79.98
  Bottom Layer w0.254: R23.1 103.15,79.9 v1(103.9,79.9)
NetIC3_8: IC3.8 R27.1 R36.2 | length 16.1
  Top Layer w0.254: R36.2@100,80.5 99.369,79.869 99.369,77.692 99.592,77.469 106.658,77.469 107.031,77.842 v1@107.031,79.569 ; R36.2@100.224,80.163 R36.2@100.224,80.476 ; v1@106.6,79.9 v1(106.7,79.9) ; v1@106.78,79.98 IC3.8
  Bottom Layer w0.254: v1(106.7,79.9) 107.4,79.9 R27.1@108.1,79.2
NetIC3_9: IC3.9 R27.2 R28.2 | length 4.5
  Top Layer w0.254: v1@106.75,81.25 IC3.9
  Bottom Layer w0.254: v1(106.7,81.2) R27.2@108.1,81.2 ; R27.2 R28.2
NetIC3_10: IC3.10 R29.2 R30.2 | length 12.1
  Top Layer w0.254: v1@106.82,82.52 IC3.10
  Bottom Layer w0.254: v1(106.7,82.5) 107.319,81.881 111.735,81.881 112.035,82.181 112.819,82.181 R29.2 ; R29.2@114.1,80.9 R30.2
NetIC3_12: IC3.12 R33.2 R34.2 | length 13.1
  Top Layer w0.254: v1@106.66,85.06 IC3.12
  Bottom Layer w0.254: v1(106.6,85) 106.731,84.869 111.013,84.869 111.519,84.363 111.519,83.835 112.035,83.319 112.765,83.319 R33.2@113.946,84.5 ; R33.2@114.1,84.7 116,86.6 R34.2
NetIC3_13: IC3.13 R31.1 R32.2 | length 5
  Top Layer w0.254: v1@106.63,86.33 IC3.13
  Bottom Layer w0.254: v1(106.6,86.3) 107.5,86.3 R31.1@108.2,85.6 ; R31.1 R32.2@109.85,85.75
NetIC3_14: IC3.14 R31.2 R37.2 | length 14.2
  Top Layer w0.254: R37.2@99.807,84.9 99.369,85.338 99.369,88.308 99.592,88.531 104.315,88.531 105.246,87.6 v1(106.6,87.6) IC3.14
  Bottom Layer w0.254: v1(106.6,87.6) R31.2@108,87.6
NetPM1_2: PM.2@116,74 R14.1 | length 31.3
  Top Layer w0.254: v1@114.1,73.8 v1(114.2,73.8) 114.9,73.8 115.1,74 PM.2@116,74
  Bottom Layer w0.254: R14.1@92.5,74.1 93.3,73.3 97.3,73.3 97.719,73.719 97.719,74.908 97.942,75.131 100.731,75.131 101.669,76.069 101.723,76.069 101.735,76.081 102.465,76.081 102.477,76.069 102.531,76.069 104.711,73.889 105.518,73.889 106.208,73.199 106.208,71.092 106.481,70.819 109.219,70.819 109.419,71.019 109.419,72.337 110.713,73.631 113.269,73.631 113.438,73.8 v1(114.2,73.8)
NetQ1_2: Q1.2 Q2.1 Q4.1 | length 13.5
  Bottom Layer w0.254: Q2.1@86.2,66.7 86.2,66.1 86.5,65.8 89.262,65.8 89.431,65.969 93.158,65.969 93.789,66.6 94.5,66.6 ; Q4.1 94.5,66.6 ; Q1.2@97.2,66.6 94.5,66.6
NetQ2_3: Q2.3 R7.2 | length 2.5
  Bottom Layer w0.254: Q2.3 89.15,66.75 89.6,67.2 R7.2@90.5,67.2
NetQ4_2: Q4.2 R51.1 | length 3.4
  Bottom Layer w0.254: R51.1@96.5,72.2 96.5,71.1 96.9,70.7 Q4.2
NetQ5_1: Q5.1 R51.2 | length 29.2
  Top Layer w0.254: v1@104.2,90.7 Q5.1
  Bottom Layer w0.254: R51.2 96.5,75.908 94.769,77.639 94.769,89.061 96.139,90.431 103.631,90.431 104,90.8 v1(104,90.9)
NetQ5_2: Q5.2 Q6.1 | length 14.4
  Top Layer w0.254: Q5.2@105.4,91.7 105.5,91.6 108.7,91.6 109.1,92 v1(109.1,92.7) ; v1(110.7,94.7) 111.119,94.281 114.281,94.281 115.5,95.5 Q6.1
  Bottom Layer w0.254: v1(109.1,92.7) 109.1,94.2 109.6,94.7 v1(110.7,94.7)
NetQ9_2: Q9.2 R16.2 | length 7.5
  Bottom Layer w0.254: R16.2 108,90.7 108.4,90.7 108.6,90.5 113.6,90.5 114.1,91 Q9.2@114.1,91.7
NetQ10_1: Q10.1 R15.1 R17.2 | length 11.3
  Bottom Layer w0.254: Q10.1 98.4,96.1 98.7,96.4 104.3,96.4 104.5,96.2 105.1,96.2 R15.1@105.4,95.9 ; R15.1@105.5,96 R17.2
NetQ11_1: Q11.1 R43.1 | length 3
  Top Layer w0.254: Q11.1 91,77.5 v1(91.8,77.5)
  Bottom Layer w0.254: v1(91.8,77.5) R43.1
NetQ12_1: Q12.1 R44.1 | length 4.2
  Top Layer w0.254: Q12.1@90.5,82.3 91.8,81 91.8,80.7 v1@91.9,80.6 ; v1(91.8,80.6) v1@91.9,80.6
  Bottom Layer w0.254: v1(91.8,80.6) v1@91.9,80.6 ; R44.1@91.8,82.3 91.8,80.7 v1@91.9,80.6
NetQ13_1: Q13.1 R45.1 | length 4.4
  Top Layer w0.254: Q13.1 91.8,85.2 v1(91.8,84)
  Bottom Layer w0.254: v1(91.8,84) R45.1@91.8,85.4
NetQ14_1: Q14.1 R46.1 | length 4.7
  Top Layer w0.254: Q14.1@90.5,90.8 91.8,89.5 v1(91.8,88.3)
  Bottom Layer w0.254: v1(91.8,88.3) R46.1
OUT1: C19.1 C23.2 OUT1.1 Q11.3 R39.2 | length 13.1
  Top Layer w0.254: OUT1.1@85.5,77.7 86.9,77.7 87.1,77.5 v1(88.1,77.5) 88.7,77.5 89.2,78 89.2,78.6 Q11.3 ; Q11.3@90.6,79.9 91.2,79.3 92.9,79.3 93.25,78.95 C19.1
  Bottom Layer w0.254: C23.2 R39.2@89.45,77.75
OUT2: C20.1 C24.2 OUT2.1 Q12.3 R40.2 | length 14.2
  Top Layer w0.254: OUT2.1 86.9,82 87.081,81.819 88.719,81.819 89.2,82.3 89.2,82.8 Q12.3@90.5,84.1 ; Q12.3@90.6,83.9 91.381,83.119 91.381,82.319 91.5,82.2 92.546,82.2 93.25,81.496 C20.1
  Bottom Layer w0.254: C24.2 R40.2
  other v1: 88.1,81.8
OUT3: C21.1 C25.2 OUT3.1 Q13.3 R41.2 | length 13.9
  Top Layer w0.254: OUT3.1@85.5,86.2 86.9,86.2 87.1,86 v1(88.1,86) 88.7,86 89.2,86.5 89.2,87.1 Q13.3 ; Q13.3@90.7,88.2 90.7,88.062 91.381,87.381 91.381,86.5 91.562,86.319 92.581,86.319 C21.1@93.3,85.6 ; C21.1 C21.1@93.25,85.496
  Bottom Layer w0.254: C25.2 R41.2@89.45,86.25
OUT4: C22.1 C26.2 OUT4.1 Q14.3 R42.2 | length 15.2
  Top Layer w0.254: OUT4.1@85.7,90.5 86.9,90.5 87.1,90.3 v1(88.1,90.3) 88.9,90.3 89.2,90.6 89.2,91.3 90.5,92.6 92.019,91.081 92.019,89.999 92.308,89.71 92.308,89.038 93.25,88.096 C22.1
  Bottom Layer w0.254: C26.2 R42.2
REM: D9.2 R18.2 REMOUT.1 | length 19.4
  Top Layer w0.254: 95.4,94.904 D9.2
  Top Layer w0.5: REMOUT.1 88.95,95.75
  Top Layer w0.75: 90.7,95 90.829,94.871 96.329,94.871 96.7,94.5
  Top Layer w1: 88.95,95.75 89.95,95.75 90.7,95 ; 96.7,94.546 100.946,94.546 101.6,95.2 R18.2@103.4,95.2
VCC: C4.1 IC2.7 IC3.4 Q3.3 R9.1 R11.2 R49.1 R49.2 | length 57.4
  Top Layer w0.254: IC3.4@102.6,83.8 104.5,83.8 104.6,83.7 104.6,83.5 ; v1@102.97,73.23 IC2.7
  Top Layer w0.7: 103.434,75.2 103.588,75.354 105.354,75.354 R49.1@106.2,76.2 ; 104.6,83.5 105.3,82.8 105.3,82.627
  Top Layer w1: Q3.3 93.4,70.2 C4.1 96.646,70.2 98.046,68.8 101.596,68.8 102.896,70.1 v1@102.896,73.4 ; v1(102.1,75.2) 103.434,75.2 ; 105.3,82.627 105.3,79.2 R49.2
  Bottom Layer w0.254: R9.1@92.5,69.25 92.5,68.961 95.326,68.961 96.52,67.767 102.499,67.767 102.64,67.908 104.8,67.908 105.377,68.485 105.377,68.842 105.71,69.175 105.71,69.548 105.7,69.558 105.7,72.989 105.308,73.381 102.919,73.381 v1(102.9,73.4) 102.646,73.4 101.765,74.281 R11.2@98.581,74.281
  Bottom Layer w1: v1(102.1,75.2) 102.9,74.4 v1(102.9,73.4)
VDD: C7.1 Q7.3 Q10.3 R10.2 R14.2 R15.2 | length 53.1
  Top Layer w0.254: C7.1@91,73.431 C7.1
  Top Layer w0.5: v1(88.392,70.764) 88.832,71.204 90.604,71.204 91,71.6 C7.1@91,72.8 ; Q7.3 89.419,73.431 C7.1@91,73.431 ; C7.1@91.2,74.4 v1(93.9,74.4)
  Bottom Layer w0.254: v1@88.428,70.728 89.45,71.75 R10.2 90.5,71.7 91.273,71.7 91.619,71.354 91.619,70.942 91.842,70.719 93.158,70.719 93.381,70.942 93.381,72.558 93.158,72.781 91.969,72.781 R14.2
  Bottom Layer w0.45: 92.8,78.1 92.8,90.827 93.573,91.6 94.7,91.6 95.879,92.779 97.221,92.779 97.6,92.4 99.8,92.4 100.3,92.9 Q10.3 103.3,93.8 103.5,94 R15.2@105.7,94
  Bottom Layer w0.5: 92.8,78.1 93.9,77 v1(93.9,74.4)
VREF: C9.1 IC2.2 IC2.6 R13.2 R21.2 R25.2 R29.1 R33.1 | length 98
  Top Layer w0.254: IC2.2@99.4,73.2 101.45,73.2 102.531,74.281 103.265,74.281 103.677,73.869 C9.1@106.769,73.869 ; IC2.6 106.04,71.96 106.3,71.7 v1(107.2,71.7)
  Top Layer w0.5: v1@107.2,71.96 C9.1@107.2,73.7
  Bottom Layer w0.254: R25.2@96.5,81.1 R21.2@96.5,85.7 ; v1(101.4,73.4) 102.75,72.05 R13.2 ; R29.1@116,81.1 R33.1@116,84.8
  Bottom Layer w0.5: 95.5,83.4 96.4,83.4 ; v1@107.2,72.061 107.2,73.1 105.78,74.52 104.98,74.52 102.8,76.7 102.738,76.7 102.726,76.712 101.474,76.712 101.462,76.7 96.6,76.7 95.4,77.9 95.4,88.8 96.4,89.8 117.5,89.8 118.5,88.8 118.5,82.9 ; 108.6,76.4 112.8,76.4 113.3,76.9 117.72,76.9 118.5,77.68 118.5,82.9 ; 116.1,82.9 118.5,82.9
pads on no net: D4.3 D5.3 D6.3 D7.3 IC2.1 IC2.5 IC2.8 Q6.4

## Polygon pours and split planes (outlines as drawn)
GND on Top Layer "GND" (solid, remove dead copper, pour order 17): 92.7,87.5 92.7,77.8 92.9,77.978 100.7,77.978 100.7,87.411 100.6,87.5
GND on Top Layer "GND" (solid, remove dead copper, pour order 15): 84.8,76.3 105.9,76.3 105.9,63 84.8,63
GND on Top Layer "GND" (solid, remove dead copper, pour order 13): 93.1,97.7 123.9,97.7 123.9,90.505 124,90.404 123.701,90.1 97.585,90.1 97.585,92.228 96.888,92.937 96.788,93.039 93.1,93.039
REM on Top Layer "REM" (solid, remove dead copper, pour order 14): 84.2,97.7 91.2,97.7 91.2,93.9 84.2,93.9
no net on Top Layer "GND" (solid, pour order 16): 108.6,90.1 117.1,90.1 117.1,92.3 108.6,92.3
GND on Bottom Layer "GND" (solid, remove dead copper, pour order 23): 84.9,97.4 84.9,76.4 92.6,76.4 92.6,97.4
GND on Bottom Layer "GND" (solid, pour order 19): 96.5,89.8 95.5,88.899 95.4,88.809 95.4,79.171 95.4,79.081 96.6,78 118.6,78 118.6,88.809 117.5,89.8
GND on Bottom Layer "GND" (solid, remove dead copper, pour order 18): 123.8,97.6 92.7,97.6 92.7,90.4 123.8,90.4
no net on Bottom Layer "GND" (solid, pour order 20): 99,92.9 99,90.6 105.315,90.6 105.4,90.679 105.4,92.9
GND on Bottom Layer "GND" (solid, remove dead copper, pour order 21): 84.7,76.5 123.8,76.5 123.8,62.7 84.7,62.7
no net on Bottom Layer "GND" (solid, pour order 22): 93,76.6 101.6,76.6 101.6,76 100.8,75.2 97.7,75.2 97,74.5 97,71.8 97,68.9 96.8,68.7 96.7,68.6 96.1,68.6 95.6,68.6 94.8,69.4 94.2,70 93,70
no net on Bottom Layer "GND" (solid, pour order 24): 123.8,68.2 121.2,68.2 120.6,68.8 120.5,68.9 120.5,72.7 123.8,72.7

## Keep-outs
Keep-Out Layer:
  lines w0.75: 83.3,61.8 83.3,98.6 124.8,98.6 124.8,61.8 83.3,61.8

## Other copper
Top Layer:
  rectangle net REM: 102.2,94.6 102.5,97
  rectangle net NetC5_1: 107.4,94.6 107.7,97

## Silkscreen, mask and mechanical layers (free items; w line width, h text height)
Top Overlay:
  rectangle: 84,96.8 88.4,97.7
  rectangle: 88.4,94.9 91.2,97.7
  rectangle: 84,93.9 91.2,94.9
  rectangle: 86.7,91.6 87.5,93.4
  rectangle: 86.7,87.3 87.5,89.2
  rectangle: 86.7,83.1 87.4,84.9
  rectangle: 86.7,78.8 87.5,80.7
  lines w0.254: 102,94.4 102,97.2 107.9,97.2 107.9,94.4 102,94.4
  lines w0.75: 104.3,76.1 84.5,76.1 84.5,62.9 123.5,62.9 ; 107.7,76.3 123.5,76.3
Bottom Overlay:
  rectangle: 106.5,88.8 111.2,89.7
  rectangle: 111.6,88 117.1,89.7
  rectangle: 119.5,87.5 123.9,89.3
  rectangle: 95,82.3 99.6,84.4
  rectangle: 90.7,76.7 103.5,77.8
  rectangle: 117.1,77.8 119.5,89.7
  rectangle: 113,76.7 119.1,77.8
  rectangle: 106.5,76.7 111.2,77.9
  rectangle: 111.2,76.7 113,89.7
  rectangle: 99.6,82.1 112.9,84.7
  rectangle: 103.5,76.6 107,89.7
  rectangle: 84.8,93.8 92,97.1
  rectangle: 115.1,62.9 118.6,65.7
  rectangle: 113.8,68.3 116.5,76.1
  rectangle: 111.2,67.9 114.8,71.7
  rectangle: 110.4,67.9 111.2,76.3
  rectangle: 89.3,63 95.2,65.8
  rectangle: 102.9,63.1 104.1,67.7
  rectangle: 100.2,72.3 104.1,76.3
  rectangle: 104.1,63.1 110.4,76.3
  lines w0.75: 84.5,76.4 119.3,76.4 ; 123.5,97.4 84.5,97.4 84.5,62.9 123.6,62.9
  lines w1: 119.5,70.7 123.4,70.7 123.4,87.7 119.5,87.7 119.5,70.7
  text "PS004 v2.1" at 120.7,72.1 h1.52 r270
Top Paste:
  rectangle: 102.2,94.6 102.5,97
  rectangle: 107.4,94.6 107.7,97
Top Solder:
  rectangle: 102.1,94.5 102.6,97.1
  rectangle: 107.3,94.5 107.8,97.1